# Altium PCB 400503.PcbDoc (part 2 of 3)
Units mm, origin at the board's own origin, x right, y up, seen from the top; angles counter-clockwise.
Board outline 200 x 200 mm, 4 copper layers (Top Layer, Mid-Layer 1, Mid-Layer 2, Bottom Layer), stack 1.58 mm thick; 173 components, 73 nets, 535 pads, 1026 vias.
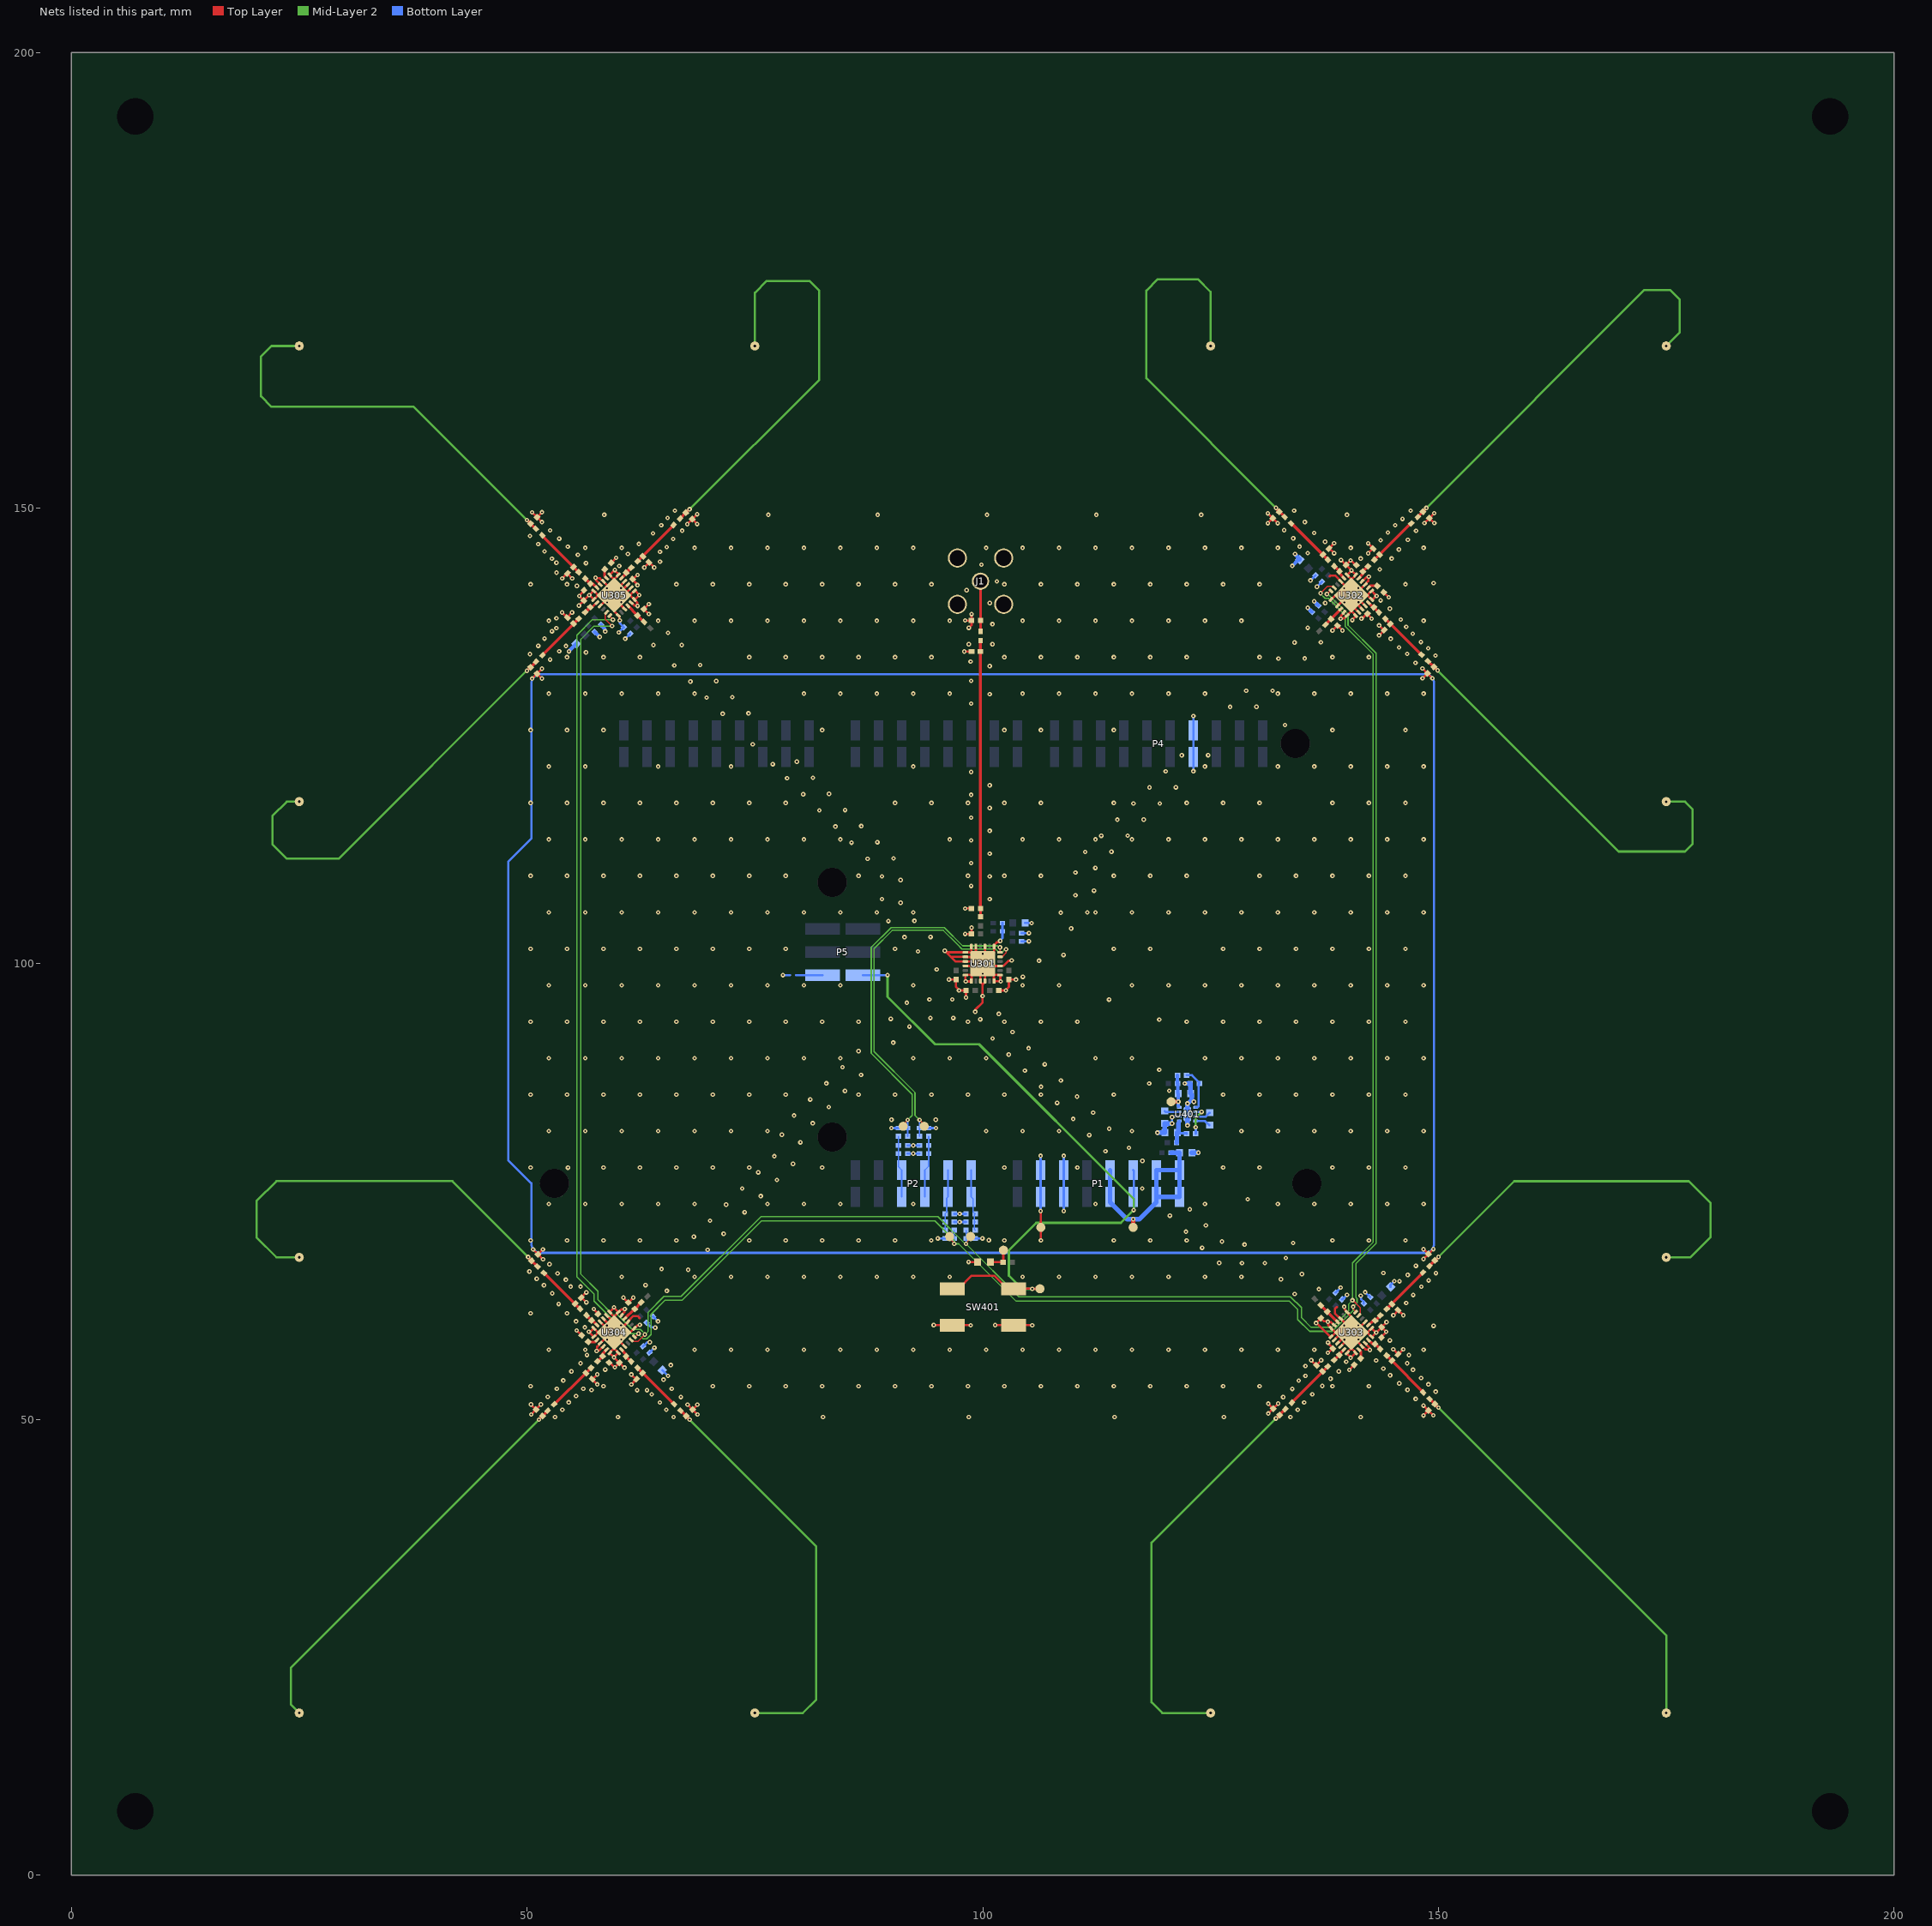
[diagram p4: the nets of this part, all layers, seen from the top]

## Via types
v1: diameter 0.5, hole 0.2, Top Layer to Bottom Layer, tented both sides, 989 vias
v2: diameter 0.5, hole 0.2, Top Layer to Bottom Layer, 25 vias
v3: diameter 0.6, hole 0.3, Top Layer to Bottom Layer, tented both sides, 12 vias

## Nets (pads, with @x,y where several pads share a name; then routed paths per layer and width w, separated by ;. In a path a pad name is that pad's centre, name@x,y a point inside that pad or via, vN(x,y) a via of type N, cw(c..) or ccw(c..) an arc to the next point about the centre after c; other vN are vias at no path point) (continued)
GND: C301.1 C302.1 C303.1 C304.1 C305.1 C306.1 C307.1 C308.1 C309.1 C310.1 C311.1 C312.1 C313.1 C314.1 C315.1 C316.1 C317.1 C318.1 C319.1 C320.1 C321.1 C322.1 C323.1 C324.1 C325.1 C326.1 C327.1 C328.1 C329.1 C401.1 C403.1 C404.1 C501.1 J1.2 J1.3 J1.4 J1.5 L305.1 L306.1 L307.1 L308.1 L309.1 L310.1 L311.1 L312.1 L313.1 L314.1 L315.1 L316.1 L501.1 LED401.1 P1.6 P1.7 P4.7 R302.1 R305.1 R308.1 R311.1 R314.1 R317.1 R320.1 R323.1 R326.1 R329.1 R332.1 R335.1 R337.2 R338.2 R339.2 R340.2 R341.1 R342.1 R343.1 R344.1 R345.1 R346.1 R347.1 R348.1 R404.1 R501.1 R502.1 R503.1 R504.1 R506.1 R507.1 SB501.2 SW401.2 TP502.1 U301.1 U301.2 U301.3 U301.4 U301.6 U301.7 U301.9 U301.10 U301.12 U301.13 U301.15 U301.19 U301.21 U301.23 U301.24 U301.25 U302.1 U302.2 U302.3 U302.4 U302.6 U302.7 U302.9 U302.10 U302.12 U302.13 U302.15 U302.19 U302.21 U302.23 U302.24 U302.25 U303.1 U303.2 U303.3 U303.4 U303.6 U303.7 U303.9 U303.10 U303.12 U303.13 U303.15 U303.19 U303.21 U303.23 U303.24 U303.25 U304.1 U304.2 U304.3 U304.4 U304.6 U304.7 U304.9 U304.10 U304.12 U304.13 U304.15 U304.19 U304.21 U304.23 U304.24 U304.25 U305.1 U305.2 U305.3 U305.4 U305.6 U305.7 U305.9 U305.10 U305.12 U305.13 U305.15 U305.19 U305.21 U305.23 U305.24 U305.25 U401.2 U401.9 V301.2 V302.2 V303.2 V304.2 V305.2 V306.2 V307.2 V308.2 V309.2 V310.2 V311.2 V312.2 V501.2 V502.2 V503.2 V504.2 V505.2 | length 667.2
  Top Layer w0.25: v1(50.43,51.656) 50.972,51.115 v1@51.513,51.656 ; v1(50.449,50.555) V308.2@50.99,51.097 ; v1@50.549,131.306 V310.2@51.09,131.847 ; v1@50.557,149.551 V311.2@51.097,149.01 ; v1@50.663,68.668 V309.2@51.204,68.127 ; v1(51.632,131.306) V310.2@51.09,131.847 ; v1@51.631,132.388 V310.2@51.09,131.847 ; v1@51.638,148.469 V311.2@51.097,149.01 ; v1(51.638,149.552) V311.2@51.097,149.01 ; v1@51.745,67.586 V309.2@51.204,68.127 ; v1(51.745,68.669) V309.2@51.204,68.127 ; v1@53.854,138.557 L314.1@54.395,138.016 ; v1(53.862,142.298) L315.1@54.403,142.84 ; L314.1@54.396,138.018 v1(54.937,138.559) ; L315.1@54.404,142.841 v1@54.945,142.299 ; v1@55.451,59.775 R339.2@55.992,59.234 ; v1(55.694,139.312) R329.1@56.234,139.855 ; L313.1@55.959,63.408 v1@56.5,63.949 ; L313.1@55.96,63.407 v1(56.502,62.866) ; R332.1@56.242,141.002 56.242,140.944 55.722,140.425 v1(55.722,140.367) R329.1@56.234,139.855 56.234,139.882 v1(56.822,140.47) v1@56.849,140.47 ; v1(56.776,59.627) 56.783,59.634 56.947,59.634 U304.6@57.319,60.006 57.354,60.006 U304.25@57.814,59.546 ; v1(56.776,59.627) U304.7@57.317,59.086 ; L312.1@57.16,54.403 v1@57.701,53.862 ; L312.1@57.16,54.404 v1@57.701,54.945 ; U304.7@57.319,59.086 57.354,59.086 U304.25@57.814,59.546 ; v1(57.329,62.122) 57.329,62.08 57.79,61.619 R326.1@57.79,61.576 R326.1@57.848,61.576 ; v1(57.522,142.366) v1@57.57,142.318 ; v1(57.634,57.522) v1@57.682,57.57 ; U304.4@58.026,60.713 U304.25@59.192,59.546 ; U305.15@58.026,139.287 U305.25@59.192,140.454 ; U305.10@58.026,141.621 58.026,141.656 57.57,142.112 v1@57.57,142.318 ; U304.10@58.379,58.026 58.344,58.026 57.888,57.57 v1@57.682,57.57 ; U304.3@58.379,61.066 U304.25@59.546,59.899 ; U304.2@58.733,61.42 U304.25@59.546,60.607 ; v2(58.766,60.317) 58.775,60.317 v2(59.546,59.546) ; v2(58.766,141.225) 58.775,141.225 v2(59.546,140.454) ; v2(58.775,58.766) 58.775,58.775 v2(59.546,59.546) ; v2(58.775,139.674) 58.775,139.683 v2(59.546,140.454) ; R323.1@58.998,56.242 59.056,56.242 59.575,55.722 v1(59.633,55.722) R320.1@60.145,56.234 60.118,56.234 v1(59.53,56.822) v1@59.53,56.849 ; U305.7@59.086,142.681 59.086,142.646 U305.25@59.546,142.186 ; U305.7@59.086,142.683 59.627,143.223 59.627,143.157 60.036,142.748 60.036,142.712 U305.6@60.006,142.681 60.006,142.646 U305.25@59.546,142.186 ; R340.2@59.234,144.007 v1@59.775,144.549 ; v1(59.53,62.322) v1@59.53,62.27 ; U304.24@60.006,61.773 60.006,61.809 59.546,62.27 v1@59.53,62.27 ; R320.1@60.145,56.234 v1(60.688,55.694) ; v1(60.17,137.678) 60.17,137.745 60.112,137.804 60.112,138.121 U305.19@60.006,138.227 60.006,138.262 59.546,138.722 U305.25@59.546,140.101 ; v2(60.317,60.326) 60.317,60.317 v2(59.546,59.546) ; v2(60.317,141.234) 60.317,141.225 v2(59.546,140.454) ; v2(60.326,58.775) 60.317,58.775 v2(59.546,59.546) ; v2(60.326,139.683) 60.317,139.683 v2(59.546,140.454) ; U304.23@60.359,61.42 60.359,61.455 60.682,61.778 v1@60.682,62.074 ; v1@60.575,63.371 R346.1@61.116,62.831 ; U304.15@60.713,58.026 U304.25@59.546,59.192 ; U305.4@60.713,141.974 U305.25@59.546,140.808 ; v1(60.73,62.122) v1@60.682,62.074 ; U305.21@60.746,138.934 U305.21@60.713,138.934 U305.25@59.546,140.101 ; U305.3@61.066,141.621 U305.25@59.899,140.454 ; R346.1@61.116,62.831 v1(61.657,63.373) ; U305.23@61.42,139.641 61.455,139.641 61.778,139.318 v1@62.074,139.318 ; U305.2@61.42,141.267 U305.25@60.607,140.454 ; v1(61.441,54.937) L311.1@61.982,54.396 ; v1@61.443,53.854 L311.1@61.984,54.395 ; v1(62.114,141.557) 62.114,141.614 61.576,142.152 R335.1@61.576,142.21 61.619,142.21 62.08,142.671 v1(62.122,142.671) ; v1(62.122,139.27) v1@62.074,139.318 ; 62.353,61.115 62.116,61.351 61.671,61.351 61.066,60.746 U304.21@61.066,60.713 U304.25@59.899,59.546 ; v1(62.37,60.378) 62.322,60.33 62.133,60.33 61.809,60.006 U304.19@61.773,60.006 61.738,60.006 61.278,59.546 U304.25@59.899,59.546 ; R348.1@62.824,138.931 v1(63.363,139.474) ; R348.1@62.824,138.931 v1(63.364,138.39) ; v1@62.866,143.499 L316.1@63.407,144.04 ; L316.1@63.408,144.041 v1@63.949,143.5 ; v1(67.586,148.254) V312.2@68.127,148.796 ; v1(67.611,51.631) V307.2@68.153,51.09 ; v1(68.669,148.255) V312.2@68.127,148.796 ; v1@68.668,149.337 V312.2@68.127,148.796 ; v1@68.694,50.549 V307.2@68.153,51.09 ; v1@68.694,51.631 V307.2@68.153,51.09 ; v1@94.626,60.349 SW401.2@96.649,60.349 v1@98.672,60.349 ; v1(95.835,101.44) v1@96.007,101.268 ; v1(96.298,98.279) 96.301,98.279 96.302,98.278 R347.1@97.07,98.278 97.07,97.475 97.398,97.147 v1(97.398,97.079) 97.401,97.079 97.402,97.078 R345.1@98.17,97.078 98.17,96.31 98.168,96.308 v1(98.168,96.306) ; v1(97.97,134.278) L501.1@98.795,134.278 ; v1(98.07,103.278) R507.1@98.77,103.278 v1(98.77,103.978) ; v1(98.07,106.078) R506.1@98.77,106.078 ; v1(98.07,137.678) V505.2@98.77,137.678 ; U301.4@98.1,99.768 U301.25@98.903,99.768 ; v1(98.441,67.286) LED401.1@99.453,67.286 ; v1(98.47,136.878) 98.77,137.178 V505.2@98.77,137.678 ; U301.24@98.75,101.918 98.758,101.91 U301.25@98.758,101.26 ; v1(98.77,138.378) V505.2@98.77,137.678 ; v2(98.903,100.011) 98.91,100.018 v2(100,100.018) ; v1(99.174,94.742) 99.174,94.941 99.986,95.753 v1(99.986,96.478) 99.986,97.732 ; U301.23@99.25,101.918 U301.25@99.25,100.768 ; v2(100.007,98.921) 100,98.928 v2(100,100.018) ; v2(100.007,101.103) 100,101.096 v2(100,100.018) ; U301.25@100.25,98.921 U301.10@100.25,98.118 100.25,97.968 100.014,97.732 99.986,97.732 ; U301.21@100.25,101.918 100.25,100.268 101.242,101.26 101.242,101.55 101.253,101.561 101.253,101.915 U301.19@101.25,101.918 101.25,102.068 101.543,102.36 101.732,102.36 101.892,102.519 v1(101.92,102.519) ; v2(101.097,100.024) 101.09,100.018 v2(100,100.018) ; v1@101.376,60.349 SW401.2@103.399,60.349 v1@105.422,60.349 ; R343.1@101.77,97.078 102.538,97.078 102.539,97.076 v1(102.542,97.076) 102.542,97.144 102.87,97.472 R341.1@102.87,98.278 103.638,98.278 103.639,98.276 v1(103.642,98.276) ; v1(101.97,98.078) v1@101.935,98.113 ; v1(103.17,100.378) 103.122,100.33 102.823,100.33 102.286,99.793 101.925,99.793 U301.15@101.9,99.768 100.25,99.768 U301.25@101.225,98.793 ; v1(106.35,72.878) 106.36,72.868 106.36,71.088 TP502.1@106.37,71.078 106.376,71.072 106.376,69.66 v1(106.382,69.655) ; v1(131.288,148.35) V301.2@131.829,148.892 ; v1@131.288,149.433 V301.2@131.829,148.892 ; v1(131.332,50.662) V306.2@131.873,51.204 ; v1(131.331,51.745) V306.2@131.873,51.204 ; v1(132.371,148.351) V301.2@131.829,148.892 ; v1@132.414,51.745 V306.2@131.873,51.204 ; v1@136.051,56.5 L310.1@136.592,55.959 ; L310.1@136.593,55.96 v1(137.134,56.502) ; v1(137.878,57.329) 137.92,57.329 138.381,57.79 R317.1@138.424,57.79 138.424,57.848 137.886,58.386 v1(137.886,58.443) ; L305.1@138.016,145.604 138.019,145.604 v1(138.559,145.063) ; L305.1@138.016,145.605 v1(138.557,146.147) ; 138.079,142.518 138.174,142.613 138.684,142.613 138.992,142.305 139.287,142.01 U302.15@139.287,141.974 U302.25@140.454,140.808 ; U302.19@138.227,139.994 138.262,139.994 138.722,140.454 U302.25@140.101,140.454 ; v1@138.382,136.582 138.922,137.123 v1(139.465,136.583) ; U303.2@138.58,58.733 U303.25@139.393,59.546 ; U303.23@138.58,60.359 138.545,60.359 138.222,60.682 v1@137.926,60.682 ; 138.885,62.353 138.649,62.116 138.649,61.671 139.254,61.066 U303.21@139.287,61.066 U303.25@140.454,59.899 ; U303.3@138.934,58.379 U303.25@140.1,59.546 ; U302.21@138.934,139.254 U302.21@138.934,139.287 U302.25@140.101,140.454 ; v1(139.27,137.878) v1@139.318,137.926 ; U303.4@139.287,58.026 U303.25@140.454,59.192 ; v1(139.312,144.306) R302.1@139.855,143.766 ; U302.23@139.641,138.58 139.641,138.545 139.318,138.222 v1@139.318,137.926 ; v1(139.67,62.378) 139.718,62.33 139.718,62.085 139.994,61.809 U303.19@139.994,61.773 139.994,61.738 140.454,61.278 U303.25@140.454,59.899 ; v2(139.674,60.317) 139.683,60.317 U303.25@140.454,59.546 ; v2(139.674,141.225) 139.683,141.225 v2(140.454,140.454) ; v2(139.683,58.765) 139.683,58.775 140.338,59.43 v2(140.57,59.43) ; v2(139.683,139.674) 139.683,139.683 v2(140.454,140.454) ; U302.24@139.994,138.227 U302.24@139.959,138.227 ; U303.25@140.216,59.43 U303.25@140.1,59.546 ; v1(140.225,55.45) R338.2@140.766,55.992 ; v1(140.559,137.72) 140.559,137.787 140.938,138.167 140.938,138.202 U302.1@140.914,138.227 140.914,138.262 U302.25@140.454,138.722 ; U303.7@140.914,57.317 v1(140.373,56.776) 140.373,56.843 139.964,57.252 139.964,57.288 U303.6@139.994,57.319 139.994,57.354 U303.25@140.454,57.814 ; U303.7@140.914,57.319 140.914,57.354 U303.25@140.454,57.814 ; R305.1@141.002,143.758 140.944,143.758 140.425,144.278 v1(140.367,144.278) R302.1@139.855,143.766 139.882,143.766 v1(140.47,143.178) v1@140.47,143.151 ; v2(141.225,60.326) 141.225,60.317 U303.25@140.57,59.662 ; v2(141.225,141.234) 141.225,141.225 v2(140.454,140.454) ; v2(141.234,58.775) 141.225,58.775 v2(140.57,59.43) ; v2(141.234,139.683) 141.225,139.683 v2(140.454,140.454) ; U302.2@141.267,138.58 U302.25@140.454,139.393 ; v1(141.557,137.886) 141.614,137.886 142.152,138.424 R308.1@142.21,138.424 142.21,138.381 142.671,137.92 v1(142.671,137.878) ; U302.3@141.621,138.934 U302.25@140.454,140.101 ; U302.10@141.621,141.974 141.656,141.974 142.112,142.43 v1@142.318,142.43 ; U303.10@141.974,58.379 141.974,58.344 142.43,57.888 v1@142.43,57.682 ; U303.15@141.974,60.713 U303.25@140.808,59.546 ; U302.4@141.974,139.287 U302.25@140.808,140.454 ; v1(142.298,146.138) 142.839,145.597 L306.1@142.841,145.597 ; v1(142.299,145.054) L306.1@142.841,145.596 ; v1(142.366,142.478) v1@142.318,142.43 ; v1(142.478,57.634) v1@142.43,57.682 ; U302.7@142.681,140.914 142.646,140.914 U302.25@142.186,140.454 ; U302.7@142.683,140.914 143.157,140.439 v1@143.157,140.373 ; v1(143.224,140.373) v1@143.157,140.373 ; v1(143.498,137.134) L307.1@144.04,136.593 ; v1@143.5,136.051 L307.1@144.041,136.592 ; R314.1@143.758,58.998 143.758,59.056 144.278,59.575 v1(144.278,59.633) R311.1@143.766,60.145 143.766,60.118 v1(143.178,59.53) v1@143.151,59.53 ; R311.1@143.766,60.146 v1(144.306,60.688) ; R337.2@144.008,140.766 v1@144.549,140.225 ; v1@145.055,57.701 L309.1@145.596,57.16 ; v1(145.063,61.441) L308.1@145.604,61.982 ; L309.1@145.597,57.16 v1@146.138,57.701 ; L308.1@145.605,61.984 v1@146.146,61.443 ; v1@148.255,131.332 V303.2@148.796,131.873 ; v1@148.255,132.414 V303.2@148.796,131.873 ; v1(148.362,50.448) V305.2@148.903,50.99 ; v1@148.362,51.531 V305.2@148.903,50.99 ; v1(148.369,67.611) V304.2@148.91,68.153 ; v1(148.368,68.694) V304.2@148.91,68.153 ; v1(148.469,148.361) V302.2@149.01,148.903 ; v1@149.337,131.332 V303.2@148.796,131.873 ; v1@149.443,50.449 V305.2@148.903,50.99 ; v1@149.451,68.694 V304.2@148.91,68.153 ; v1(149.552,148.362) V302.2@149.01,148.903 ; v1@149.551,149.443 V302.2@149.01,148.903 ; v1@56.849,140.47 56.849,140.454 57.308,139.994 U305.13@57.319,139.994 57.354,139.994 U305.25@57.814,140.454 ; v1@56.849,140.47 57.292,140.914 U305.12@57.319,140.914 57.354,140.914 U305.25@57.814,140.454 ; v1@57.57,142.318 58,142.318 58.344,141.974 U305.9@58.379,141.974 U305.25@59.546,140.808 ; v1@57.682,57.57 57.682,58 58.026,58.344 U304.9@58.026,58.379 U304.25@59.192,59.546 ; U304.25@57.814,59.546 U304.25@59.192,59.546 ; U305.25@57.814,140.454 U305.25@59.192,140.454 ; U304.25@59.192,59.546 v2(59.546,59.546) ; U305.25@59.192,140.454 v2(59.546,140.454) ; v1@59.53,56.849 59.546,56.849 60.006,57.308 U304.13@60.006,57.319 60.006,57.354 U304.25@59.546,57.814 ; v1@59.53,56.849 59.086,57.292 U304.12@59.086,57.319 59.086,57.354 U304.25@59.546,57.814 ; v1@59.53,62.27 59.078,61.817 59.078,61.782 U304.1@59.086,61.773 59.086,61.738 U304.25@59.546,61.278 ; U304.25@59.546,57.814 U304.25@59.546,59.192 ; U304.25@59.546,59.192 v2(59.546,59.546) ; v2(59.546,59.546) U304.25@59.546,59.899 ; v2(59.546,59.546) U304.25@59.899,59.546 ; U304.25@59.546,59.899 U304.25@59.546,60.607 ; U304.25@59.546,60.607 U304.25@59.546,61.278 ; U304.25@59.546,61.278 60.006,61.738 U304.24@60.006,61.773 60.041,61.773 60.342,62.074 v1@60.682,62.074 ; U305.25@59.546,140.101 v2(59.546,140.454) ; v2(59.546,140.454) U305.25@59.899,140.454 ; v2(59.546,140.454) U305.25@59.546,140.808 ; U305.25@59.546,140.808 U305.25@59.546,142.186 ; U305.25@59.899,140.454 U305.25@60.607,140.454 ; U305.25@60.607,140.454 U305.25@61.278,140.454 ; U305.25@61.278,140.454 61.738,139.994 U305.24@61.773,139.994 ; U305.25@61.278,140.454 61.738,140.914 U305.1@61.773,140.914 61.879,140.914 v1(62.322,140.47) 61.847,139.994 U305.24@61.773,139.994 ; U305.24@61.773,139.994 61.773,139.959 62.074,139.658 v1@62.074,139.318 ; v1@96.007,101.268 96.507,100.768 ; v1@96.007,101.268 U301.1@98.1,101.268 98.5,101.268 98.508,101.26 U301.25@98.758,101.26 ; 96.507,100.768 97.007,100.268 U301.3@98.1,100.268 99.75,100.268 U301.25@99.258,100.76 ; 96.507,100.768 U301.2@98.1,100.768 98.108,100.76 U301.25@99.258,100.76 ; U301.25@98.758,101.26 U301.25@99.25,100.768 ; U301.25@98.775,98.793 U301.25@99.75,99.768 ; U301.25@98.775,98.793 98.125,98.793 U301.6@98.1,98.768 98.096,98.763 98.096,98.022 v1(98.139,98.065) 98.725,98.065 98.75,98.09 U301.7@98.75,98.118 98.775,98.143 U301.25@98.775,98.793 ; U301.25@99.25,100.768 U301.25@99.258,100.76 ; U301.25@99.75,99.768 U301.9@99.75,98.118 99.75,97.968 99.986,97.732 ; U301.25@99.75,99.768 v2(100,100.018) ; U301.25@101.225,98.793 101.225,98.143 U301.12@101.25,98.118 101.27,98.098 101.92,98.098 v1@101.935,98.113 ; U301.25@101.225,98.793 101.875,98.793 U301.13@101.9,98.768 101.91,98.768 101.935,98.743 v1@101.935,98.113 ; v1@137.926,60.682 v1(137.878,60.73) 137.83,60.778 137.443,60.778 137.116,61.104 R344.1@137.116,61.124 v1(136.576,60.582) 136.642,60.583 138.165,59.06 138.201,59.06 U303.1@138.227,59.086 138.262,59.086 U303.25@138.722,59.546 ; v1@137.926,60.682 137.926,60.342 138.227,60.041 U303.24@138.227,60.006 138.262,60.006 U303.25@138.722,59.546 ; U303.25@138.722,59.546 U303.25@139.393,59.546 ; v1@139.318,137.926 139.658,137.926 U302.24@139.959,138.227 ; U303.25@139.393,59.546 U303.25@140.1,59.546 ; U302.24@139.959,138.227 U302.25@140.454,138.722 ; U303.25@140.1,59.546 U303.25@140.454,59.546 ; U302.25@140.101,140.454 v2(140.454,140.454) ; U303.25@140.454,57.814 U303.25@140.454,59.192 ; U303.25@140.454,59.192 U303.9@141.621,58.026 141.656,58.026 142,57.682 v1@142.43,57.682 ; U303.25@140.454,59.192 140.57,59.308 v2(140.57,59.43) ; U303.25@140.454,59.546 U303.25@140.57,59.546 ; U303.25@140.454,59.546 v2(140.57,59.43) ; U303.25@140.454,59.899 140.57,59.784 U303.25@140.57,59.662 ; U302.25@140.454,138.722 U302.25@140.454,139.393 ; U302.25@140.454,139.393 U302.25@140.454,140.101 ; U302.25@140.454,140.101 v2(140.454,140.454) ; v2(140.454,140.454) U302.25@140.808,140.454 ; v2(140.454,140.454) U302.25@140.454,140.808 ; U302.25@140.454,140.808 U302.25@140.454,142.186 ; U302.25@140.454,142.186 140.914,142.646 U302.12@140.914,142.681 140.914,142.708 v1@140.47,143.151 ; U302.25@140.454,142.186 139.994,142.646 U302.13@139.994,142.681 139.994,142.692 140.454,143.151 v1@140.47,143.151 ; v2(140.57,59.43) U303.25@140.57,59.546 ; v2(140.57,59.43) 140.692,59.43 U303.25@140.808,59.546 ; U303.25@140.57,59.546 U303.25@140.57,59.662 ; U303.25@140.57,59.546 U303.25@140.808,59.546 ; U303.25@140.808,59.546 U303.25@142.186,59.546 ; U302.25@140.808,140.454 U302.9@141.974,141.621 141.974,141.656 142.318,142 v1@142.318,142.43 ; U302.25@140.808,140.454 U302.25@142.186,140.454 ; U303.25@142.186,59.546 142.646,59.086 U303.12@142.681,59.086 142.708,59.086 v1@143.151,59.53 ; U303.25@142.186,59.546 142.646,60.006 U303.13@142.681,60.006 142.692,60.006 143.151,59.546 v1@143.151,59.53 ; U302.25@142.186,140.454 142.646,139.994 U302.6@142.681,139.994 142.712,139.964 142.748,139.964 v1@143.157,140.373
  Bottom Layer w0.25: v1(60.07,136.378) C325.1@60.616,136.924 60.616,136.931 60.189,137.359 60.189,137.659 v1(60.17,137.678) ; v1(60.77,135.678) C315.1@61.316,136.224 ; C322.1@62.724,58.031 63.17,58.478 v1(63.47,58.478) ; C323.1@63.124,60.624 63.622,60.126 64.022,60.126 v1(64.07,60.078) ; C311.1@63.424,57.331 v1(63.97,57.878) ; C312.1@63.824,61.31 63.837,61.31 v1(64.37,60.778) ; C310.1@64.847,55.4 v1(65.47,54.778) ; v1(78.068,98.762) SB501.2@78.85,98.762 ; v1(89.97,81.978) C326.1@90.77,81.978 ; V504.2@91.77,79.178 v1(92.37,79.178) V503.2@93.07,79.178 ; R504.1@91.77,80.078 v1(92.37,80.078) R503.1@93.07,80.078 ; C327.1@94.07,81.978 v1(94.87,81.978) ; v1(95.07,69.878) C328.1@95.87,69.878 ; R502.1@96.87,71.678 v1(97.47,71.678) R501.1@98.17,71.678 ; V502.2@96.87,72.578 v1(97.47,72.578) V501.2@98.17,72.578 ; C329.1@99.17,69.878 v1(99.97,69.878) ; v1(101.92,102.519) 101.92,102.587 102.17,102.837 C321.1@102.17,103.578 C303.1@102.17,104.478 ; C320.1@104.27,102.478 v1(105.07,102.478) ; C302.1@104.27,103.378 v1(105.07,103.378) ; C301.1@104.645,104.478 v1(105.37,104.478) ; v1(106.35,72.878) P1.7@106.35,74.44 P1.7@106.35,77.37 v1(106.35,78.932) ; v1(108.89,72.878) P1.6@108.89,77.37 v1(108.89,78.932) ; v1(120.77,82.478) v1(120.77,83.178) 120.838,83.178 120.918,83.258 U401.2@121.565,83.258 ; v1(123.114,121.138) v1(123.114,127.192) ; v1(135.97,142.078) C305.1@136.516,142.624 ; v1(136.67,141.378) C316.1@137.216,141.924 ; C309.1@138.724,63.931 v1(139.27,64.478) ; C319.1@139.431,63.184 139.476,63.184 v1(139.97,63.678) ; v1(141.47,63.578) 141.518,63.53 141.518,63.207 141.816,62.908 C318.1@141.816,62.731 ; v1(141.97,63.978) C308.1@142.516,63.431 ; C307.1@144.747,64.555 144.747,64.755 v1(145.17,65.178)
  Bottom Layer w0.254: 47.93,78.445 50.47,75.905 50.47,69.301 ccw(c51.473,69.288) 51.461,68.285 148.514,68.285 ccw(c148.514,69.301) 149.53,69.301 149.53,130.794 ccw(c148.527,130.782) 148.514,131.785 51.486,131.785 ccw(c51.486,130.769) 50.47,130.769 50.47,113.751 47.93,111.211 47.93,78.445
  Bottom Layer w0.4: v1@54.576,134.301 C313.1@55.393,135.118 ; C314.1@57.424,136.424 v1(57.97,135.878) ; C324.1@58.124,137.224 58.124,137.153 58.551,136.726 58.551,136.497 v1(58.57,136.478) ; v1(133.97,143.678) 134.647,144.355 C304.1@134.793,144.355 134.793,144.428 134.27,144.951 v1(134.27,144.978) ; v1(135.67,139.078) C306.1@136.116,138.631 ; v1(136.37,139.778) C317.1@136.816,139.331
  Bottom Layer w0.5: v1(119.17,81.478) C401.1@119.995,81.478 119.983,81.49 119.983,82.44 C403.1@120.02,82.478 ; C403.1@119.97,82.503 119.995,82.478 C403.1@120.02,82.478 ; v1(120.77,82.478) C403.1@120.02,82.478 ; v1(122.17,86.878) R404.1@122.77,86.878 122.793,86.855 122.793,85.8 C404.1@122.815,85.778 122.94,85.653 122.94,85.108 ; v1(122.47,82.278) 122.47,83.498 U401.9@122.46,83.508 122.47,83.518 v1(122.47,84.678) 122.51,84.678 122.94,85.108 ; C501.1@122.945,79.278 v1(123.67,79.278) ; v1(123.17,84.878) 122.94,85.108
  other v1: 53.07,50.278 59.97,50.278 66.073,50.27 82.47,50.278 98.47,50.278 114.47,50.278 126.47,50.278 133.771,50.262 141.47,50.278 149.444,50.449 68.695,50.549 65.273,51.07 134.571,51.062 53.87,51.078 148.361,51.531 68.694,51.632 51.513,51.657 132.414,51.746 54.57,51.878 64.573,51.87 135.271,51.862 147.51,52.258 132.971,52.462 52.27,52.478 66.873,52.47 55.37,52.578 63.673,52.77 136.171,52.762 149.71,53.058 57.066,53.225 62.079,53.217 63.163,53.218 146.61,53.258 53.27,53.378 56.17,53.378 65.873,53.37 133.971,53.362 50.382,53.655 58.382,53.655 70.382,53.655 74.382,53.655 78.382,53.655 82.382,53.655 86.382,53.655 90.382,53.655 94.382,53.655 98.382,53.655 102.382,53.655 106.382,53.655 110.382,53.655 114.382,53.655 118.382,53.655 122.382,53.655 126.382,53.655 130.382,53.655 138.382,53.655 142.382,53.655 137.27,53.678 57.702,53.862 61.443,53.853 148.91,53.858 145.71,53.958 134.671,54.262 53.97,54.278 64.97,54.378 138.17,54.478 148.11,54.558 135.416,54.78 144.71,54.858 57.701,54.946 54.87,55.278 139.07,55.278 147.21,55.458 58.57,55.478 143.97,55.578 135.413,55.864 65.77,55.978 55.87,56.178 146.57,56.178 139.888,56.341 143.17,56.478 136.05,56.5 56.57,57.078 146.775,57.066 52.382,57.655 56.382,57.655 68.382,57.655 72.382,57.655 76.382,57.655 80.382,57.655 84.382,57.655 88.382,57.655 92.382,57.655 96.382,57.655 100.382,57.655 104.382,57.655 108.382,57.655 112.382,57.655 116.382,57.655 120.382,57.655 124.382,57.655 128.382,57.655 132.382,57.655 136.382,57.655 148.382,57.655 145.054,57.701 146.138,57.702 144.67,58.678 55.45,59.775 56.341,60.112 149.47,60.278 94.62,60.355 98.679,60.343 101.37,60.355 105.429,60.343 55.37,60.778 146.147,61.443 50.382,61.655 54.382,61.655 53.47,62.678 146.47,62.778 60.574,63.371 147.235,63.667 134.226,63.764 52.754,63.837 56.5,63.95 65.339,64.116 136.892,64.299 148.135,64.567 54.78,64.584 55.864,64.587 51.854,64.737 62.998,64.746 145.735,65.167 148.935,65.267 54.254,65.337 132.718,65.39 51.054,65.437 60.382,65.655 68.382,65.655 72.382,65.655 76.382,65.655 80.382,65.655 84.382,65.655 88.382,65.655 92.382,65.655 96.382,65.655 104.382,65.655 108.382,65.655 112.382,65.655 116.382,65.655 120.382,65.655 124.382,65.655 128.382,65.655 146.635,65.867 135.025,65.962 53.354,66.037 143.97,66.078 149.735,66.067 50.254,66.237 67.672,66.426 64.766,66.513 147.535,66.867 52.454,67.037 128.45,67.16 130.95,67.158 125.95,67.187 51.746,67.586 133.258,67.73 69.815,68.613 50.662,68.668 149.451,68.695 124.072,68.836 128.732,69.196 134.07,69.378 126.255,69.532 50.382,69.655 54.382,69.655 58.382,69.655 62.382,69.655 66.382,69.655 74.382,69.655 78.382,69.655 82.382,69.655 86.382,69.655 90.382,69.655 94.347,69.655 102.382,69.655 114.382,69.655 118.382,69.655 122.382,69.655 138.382,69.655 142.382,69.655 146.382,69.655 100.67,69.678 68.302,70.049 71.566,70.381 122.304,70.604 124.487,71.3 70.069,71.817 120.536,72.372 73.877,72.745 122.72,73.068 71.837,73.584 52.382,73.655 56.382,73.655 60.382,73.655 64.382,73.655 68.382,73.655 76.382,73.655 80.382,73.655 84.382,73.655 92.382,73.655 112.382,73.655 124.382,73.655 132.382,73.655 136.382,73.655 140.382,73.655 144.382,73.655 148.382,73.655 129.07,74.178 75.645,74.513 73.605,75.352 117.498,75.338 77.412,76.28 75.373,77.12 50.382,77.655 54.491,77.64 58.382,77.655 62.382,77.655 66.382,77.655 70.382,77.655 74.382,77.655 82.382,77.655 102.382,77.655 110.382,77.655 126.382,77.655 130.382,77.655 138.382,77.655 142.382,77.655 146.382,77.655 79.18,78.048 117.528,78.378 77.141,78.888 113.465,79.443 116.038,79.824 79.988,80.414 111.697,81.211 77.952,81.252 52.382,81.655 56.382,81.655 60.382,81.655 64.382,81.655 68.382,81.655 72.382,81.655 76.382,81.655 100.382,81.655 104.382,81.655 108.382,81.655 116.382,81.655 128.382,81.655 132.382,81.655 136.382,81.655 140.382,81.655 144.382,81.655 148.382,81.655 113.881,81.906 81.345,82.513 89.995,82.903 94.845,82.903 109.93,82.978 79.306,83.354 112.113,83.674 83.113,84.281 108.162,84.746 81.074,85.121 110.345,85.442 50.382,85.655 54.382,85.655 58.382,85.655 62.382,85.655 66.382,85.655 70.382,85.655 74.382,85.655 78.382,85.655 86.382,85.655 90.382,85.655 94.382,85.655 98.382,85.655 102.382,85.655 106.382,85.655 114.382,85.655 126.382,85.655 130.382,85.655 134.382,85.655 138.382,85.655 142.382,85.655 146.382,85.655 84.881,86.049 120.47,86.078 106.394,86.514 118.27,86.878 82.842,86.889 108.577,87.21 86.649,87.817 104.626,88.282 119.37,88.378 84.61,88.657 106.81,88.978 52.382,89.655 56.382,89.655 60.382,89.655 64.382,89.655 68.382,89.655 72.382,89.655 76.382,89.655 80.382,89.655 84.382,89.655 92.382,89.655 96.382,89.655 100.382,89.655 112.382,89.655 116.382,89.655 124.382,89.655 128.382,89.655 132.382,89.655 136.382,89.655 140.382,89.655 144.382,89.655 148.382,89.655 102.859,90.05 86.378,90.425 105.042,90.745 90.184,91.352 101.091,91.817 103.274,92.513 91.952,93.12 50.382,93.655 54.382,93.655 58.382,93.655 62.382,93.655 66.382,93.655 70.382,93.655 74.382,93.655 78.382,93.655 82.382,93.655 86.382,93.655 98.382,93.655 102.382,93.655 106.382,93.655 110.382,93.655 122.382,93.655 126.382,93.655 130.382,93.655 134.382,93.655 138.382,93.655 142.382,93.655 146.382,93.655 119.37,93.878 99.732,93.916 89.913,93.96 94.269,94.06 96.769,94.06 101.768,94.508 91.681,95.728 113.87,96.078 94.154,96.096 96.654,96.096 52.382,97.655 56.382,97.655 60.382,97.655 64.382,97.655 68.382,97.655 72.382,97.655 76.382,97.655 80.382,97.655 84.382,97.655 92.382,97.655 104.382,97.655 108.382,97.655 116.382,97.655 120.382,97.655 124.382,97.655 128.382,97.655 132.382,97.655 136.382,97.655 140.382,97.655 144.382,97.655 148.382,97.655 104.405,98.573 94.952,99.392 106.173,100.341 108.87,100.978 92.899,101.369 50.382,101.655 54.382,101.655 58.382,101.655 62.382,101.655 66.382,101.655 70.382,101.655 74.382,101.655 78.382,101.655 90.382,101.655 114.382,101.655 118.382,101.655 126.382,101.655 130.382,101.655 134.382,101.655 138.382,101.655 142.382,101.655 146.382,101.655 91.416,102.928 94.274,102.949 109.708,103.876 89.648,104.696 92.506,104.717 108.563,105.61 52.382,105.655 56.382,105.655 60.382,105.655 64.382,105.655 68.382,105.655 72.382,105.655 76.382,105.655 80.382,105.655 84.382,105.655 88.382,105.655 92.382,105.655 111.476,105.644 112.382,105.655 116.382,105.655 120.382,105.655 124.382,105.655 128.382,105.655 132.382,105.655 136.382,105.655 140.382,105.655 144.382,105.655 148.382,105.655 90.988,106.702 88.952,107.097 100.768,107.099 110.173,107.523 112.209,108.034 98.732,108.55 90.988,109.202 88.952,109.597 100.768,109.599 50.382,109.655 54.382,109.655 58.382,109.655 62.382,109.655 66.382,109.655 70.382,109.655 74.382,109.655 78.382,109.655 86.382,109.655 98.382,109.655 102.382,109.655 106.382,109.655 114.382,109.655 118.382,109.655 122.382,109.655 130.382,109.655 134.382,109.655 138.382,109.655 142.382,109.655 146.382,109.655 110.173,110.023 112.362,110.53 98.732,111.05 87.373,111.535 90.209,111.578 100.768,112.099 111.237,112.285 114.129,112.297 85.605,113.303 88.441,113.346 98.732,113.55 52.382,113.655 56.382,113.655 60.382,113.655 64.382,113.655 68.382,113.655 72.382,113.655 76.382,113.655 80.382,113.655 84.382,113.655 96.382,113.655 104.382,113.655 108.382,113.655 112.382,113.655 116.382,113.655 120.382,113.655 124.382,113.655 128.382,113.655 132.382,113.655 136.382,113.655 140.382,113.655 144.382,113.655 148.382,113.655 113.005,114.052 115.897,114.065 100.768,114.599 83.838,115.07 86.674,115.114 114.773,115.82 117.665,115.833 98.732,116.05 82.07,116.838 84.906,116.881 100.768,117.099 116.541,117.588 119.433,117.601 50.382,117.655 54.382,117.655 58.382,117.655 62.382,117.655 66.382,117.655 70.382,117.655 74.382,117.655 78.382,117.655 90.382,117.655 94.382,117.655 98.382,117.655 102.382,117.655 106.382,117.655 114.382,117.655 122.382,117.655 126.382,117.655 130.382,117.655 138.382,117.655 142.382,117.655 146.382,117.655 98.732,118.55 80.302,118.606 83.138,118.649 118.309,119.356 121.2,119.369 100.768,119.599 78.534,120.374 81.37,120.417 98.732,121.05 120.076,121.124 52.382,121.655 56.382,121.655 64.382,121.655 72.382,121.655 92.382,121.655 124.382,121.655 132.382,121.655 136.382,121.655 140.382,121.655 144.382,121.655 148.382,121.655 76.959,121.913 79.603,122.185 121.844,122.891 124.736,122.904 74.756,124.088 50.382,125.655 54.382,125.655 58.382,125.655 82.382,125.655 102.382,125.655 106.382,125.655 114.382,125.655 138.382,125.655 146.382,125.655 133.166,126.206 71.463,127.445 74.299,127.488 127.147,128.195 130.039,128.207 98.732,128.55 69.695,129.213 72.531,129.256 100.768,129.599 52.382,129.655 56.382,129.655 60.382,129.655 64.382,129.655 68.382,129.655 80.382,129.655 84.382,129.655 88.382,129.655 92.382,129.655 96.382,129.655 104.382,129.655 108.382,129.655 112.382,129.655 116.382,129.655 120.382,129.655 124.382,129.655 132.382,129.655 136.382,129.655 140.382,129.655 144.382,129.655 148.382,129.655 128.915,129.962 131.807,129.975 67.928,130.98 70.764,131.024 98.732,131.05 50.549,131.305 148.255,131.331 149.338,131.332 51.631,132.389 148.254,132.414 100.77,132.678 66.16,132.748 68.996,132.791 147.486,133.023 98.67,133.178 52.525,133.394 132.451,133.498 135.343,133.511 54.382,133.655 58.382,133.655 62.382,133.655 74.382,133.655 78.382,133.655 82.382,133.655 86.382,133.655 90.382,133.655 94.382,133.655 102.382,133.655 106.382,133.655 110.382,133.655 114.382,133.655 118.382,133.655 122.382,133.655 130.382,133.655 138.382,133.655 142.382,133.655 149.686,133.823 50.325,133.994 146.586,134.023 56.47,134.178 53.525,134.294 54.594,134.283 148.886,134.623 145.686,134.723 54.27,134.878 51.225,134.894 63.87,134.978 66.97,134.978 98.47,135.078 101.07,135.078 134.218,135.266 137.11,135.278 148.086,135.323 144.77,135.678 51.925,135.694 143.5,136.05 147.186,136.223 65.46,136.327 52.725,136.494 138.382,136.581 53.218,136.837 135.67,136.878 146.47,136.978 101.07,137.278 52.382,137.654 64.382,137.654 68.382,137.654 72.382,137.654 76.382,137.654 80.382,137.654 84.382,137.654 88.382,137.654 92.382,137.654 96.382,137.654 104.382,137.654 108.382,137.654 112.382,137.654 116.382,137.654 120.382,137.654 124.382,137.654 128.382,137.654 148.382,137.654 145.87,137.778 53.217,137.921 53.853,138.557 144.67,138.978 100.778,139.597 137.579,139.596 143.659,139.888 144.55,140.225 98.24,140.999 55.47,141.478 50.382,141.654 54.382,141.654 66.382,141.654 70.382,141.654 74.382,141.654 78.382,141.654 82.382,141.654 86.382,141.654 90.382,141.654 94.382,141.654 102.382,141.654 106.382,141.654 110.382,141.654 114.382,141.654 118.382,141.654 122.382,141.654 126.382,141.654 130.382,141.654 146.382,141.654 149.47,141.778 101.558,141.972 54.946,142.299 53.225,142.934 59.627,143.224 143.57,143.278 62.866,143.498 63.95,143.5 60.112,143.659 99.862,143.808 56.47,143.978 53.224,144.018 64.587,144.136 52.725,144.462 141.47,144.478 144.87,144.478 59.775,144.55 55.57,144.878 61.07,144.978 135.67,145.078 64.584,145.22 51.925,145.262 145.67,145.478 56.382,145.654 60.382,145.654 68.382,145.654 72.382,145.654 76.382,145.654 80.382,145.654 84.382,145.654 88.382,145.654 92.382,145.654 100.382,145.654 104.382,145.654 108.382,145.654 112.382,145.654 116.382,145.654 120.382,145.654 124.382,145.654 128.382,145.654 132.382,145.654 140.382,145.654 148.382,145.654 65.325,145.734 54.47,145.778 134.774,145.794 51.225,146.062 62.27,146.078 137.574,146.323 143.67,146.478 146.654,146.523 66.025,146.634 53.525,146.662 134.074,146.694 50.325,146.962 63.825,147.234 136.371,147.289 144.454,147.323 67.025,147.534 147.554,147.523 52.525,147.562 133.074,147.594 145.254,148.123 64.725,148.134 51.639,148.469 135.347,148.48 146.054,148.823 65.425,148.934 58.47,149.278 76.47,149.278 88.47,149.278 100.47,149.278 112.47,149.278 123.97,149.278 139.97,149.278 68.668,149.338 131.287,149.433 149.551,149.445 50.555,149.551 146.954,149.723 66.225,149.734 134.17,149.726
NetANT_1_1: ANT_1.1 C330.2 V301.1 | length 45.2
  Top Layer w0.315: v1(132.174,150.033) 132.174,149.997 132.536,149.635 V301.1@132.536,149.599 132.575,149.599 C330.2@133.136,149.038
  Mid-Layer 2 w0.24: v3(125,167.8) 125,173.751 123.633,175.117 119.207,175.117 117.955,173.866 117.955,164.251 v1(132.174,150.033)
NetANT_2_1: ANT_2.1 C331.2 V302.1 | length 45.2
  Top Layer w0.315: C331.2@147.735,149.039 V302.1@148.303,149.609 ; V302.1@148.303,149.61 148.303,149.627 148.684,150.008 v1(148.684,150.025)
  Mid-Layer 2 w0.24: v1(148.684,150.025) 172.601,173.943 175.437,173.943 176.465,172.914 176.465,169.265 v3(175,167.8)
NetANT_3_1: ANT_3.1 C332.2 V303.1 | length 45.2
  Top Layer w0.315: C332.2@148.861,133.204 148.879,133.204 V303.1@149.503,132.58 149.521,132.58 149.901,132.2 v1(149.919,132.2)
  Mid-Layer 2 w0.24: v1(149.919,132.2) 149.919,132.192 169.782,112.328 177.049,112.328 177.902,113.182 177.902,116.958 177.07,117.791 v3@174.851,117.791
  other v3: 175,117.791
NetANT_4_1: ANT_4.1 C333.2 V304.1 | length 45.2
  Top Layer w0.315: C333.2@149.014,66.847 149.018,66.847 V304.1@149.617,67.446 v1(150.015,67.844)
  Mid-Layer 2 w0.24: v1(150.015,67.844) 158.315,76.144 177.489,76.144 179.852,73.781 179.852,70 177.643,67.79 v3@175,67.79
  other v3: 175,67.799
NetANT_5_1: ANT_5.1 C334.2 V305.1 | length 45.2
  Top Layer w0.315: C334.2@149.039,52.265 149.041,52.265 V305.1@149.61,51.697 v1(150.008,51.299)
  Mid-Layer 2 w0.24: v1(150.008,51.299) 175,26.307 v3(175,17.8)
NetANT_6_1: ANT_6.1 C335.2 V306.1 | length 45.2
  Top Layer w0.315: v1(132.164,50.116) 132.182,50.116 132.562,50.497 V306.1@132.58,50.497 132.58,50.506 133.204,51.13 C335.2@133.204,51.139
  Mid-Layer 2 w0.24: v3(125,17.799) 119.712,17.799 118.53,18.981 118.53,36.482 v1(132.164,50.116)
NetANT_7_1: ANT_7.1 C336.2 V307.1 | length 45.2
  Top Layer w0.315: C336.2@66.847,50.986 66.847,50.982 V307.1@67.446,50.383 v1(67.844,49.985)
  Mid-Layer 2 w0.24: v1@67.832,49.973 81.73,36.075 81.73,19.266 80.264,17.8 v3(75,17.8)
NetANT_8_1: ANT_8.1 C337.2 V308.1 | length 45.2
  Top Layer w0.315: v1(51.299,49.992) V308.1@51.697,50.39 51.697,50.393 C337.2@52.265,50.961
  Mid-Layer 2 w0.24: v3(25,17.8) 24.072,18.728 24.072,22.741 v1@51.311,49.98
NetANT_9_1: ANT_9.1 C338.2 V309.1 | length 45.2
  Top Layer w0.315: v1(50.116,67.836) 50.116,67.818 50.497,67.438 V309.1@50.497,67.42 51.121,66.796 C338.2@51.139,66.796
  Mid-Layer 2 w0.24: v3(25,67.8) 22.488,67.8 20.305,69.983 20.305,73.961 22.497,76.154 41.798,76.154 v1(50.116,67.836)
NetANT_10_1: ANT_10.1 C339.2 V310.1 | length 45.2
  Top Layer w0.315: v1(49.985,132.156) V310.1@50.383,132.554 50.387,132.554 C339.2@50.986,133.153
  Mid-Layer 2 w0.24: v3(25,117.8) 23.626,117.8 22.059,116.233 22.059,113.115 23.606,111.569 29.363,111.569 49.95,132.156 v1(49.985,132.156)
NetANT_11_1: ANT_11.1 C340.2 V311.1 | length 45.2
  Top Layer w0.315: v1(49.992,148.701) V311.1@50.39,148.303 50.393,148.303 C340.2@50.961,147.735
  Mid-Layer 2 w0.24: v3(25,167.8) 21.952,167.8 20.812,166.659 20.812,162.278 21.952,161.137 37.557,161.137 v1(49.992,148.701)
NetANT_12_1: ANT_12.1 C341.2 V312.1 | length 45.2
  Top Layer w0.315: C341.2@66.796,148.861 66.796,148.879 V312.1@67.42,149.503 67.438,149.503 67.818,149.884 v1(67.836,149.884)
  Mid-Layer 2 w0.24: v1(67.836,149.884) 82.054,164.102 82.054,173.854 80.974,174.934 76.286,174.934 75,173.648 v3(75,167.8)
NetC326_2: C326.2 R352.2 TP304.1 U301.18 | length 40.2
  Top Layer w0.15: TP304.1@91.27,82.178 91.27,82.378 v1(91.77,82.878) ; v1(101.899,101.809) 101.9,101.808 U301.18@101.9,101.268
  Mid-Layer 2 w0.15: v1(91.77,82.878) 92.27,83.378 92.27,85.678 87.77,90.178 87.77,101.802 89.946,103.978 95.794,103.978 97.794,101.978 101.636,101.978 101.804,101.809 v1(101.899,101.809)
  Bottom Layer w0.15: R352.2@91.77,81.078 C326.2@91.77,81.978 v1(91.77,82.878)
NetC327_2: C327.2 R351.2 TP303.1 U301.17 | length 41.2
  Top Layer w0.15: v1(93.07,82.878) 93.57,82.378 TP303.1@93.57,82.178 ; U301.17@101.9,100.768 102.128,100.768 102.549,101.188 102.549,101.581 v1(102.56,101.592)
  Mid-Layer 2 w0.15: v1(93.07,82.878) 92.57,83.378 92.57,85.878 88.07,90.378 88.07,101.678 90.07,103.678 95.67,103.678 97.17,102.178 97.724,101.624 101.412,101.624 101.702,101.334 102.207,101.334 102.465,101.592 v1(102.56,101.592)
  Bottom Layer w0.15: R351.2@93.07,81.078 C327.2@93.07,81.978 v1(93.07,82.878)
NetC328_2: C328.2 R350.2 TP302.1 U302.18 U303.18 U304.18 U305.18 | length 264.4
  Top Layer w0.15: U305.18@59.086,138.227 59.079,138.219 59.079,138.113 v1(59.422,137.77) ; U304.18@61.773,59.086 61.781,59.079 61.887,59.079 v1(62.23,59.422) ; TP302.1@96.37,70.078 96.37,69.872 96.87,69.372 v1(96.87,69.278) ; v1(137.77,140.578) 138.113,140.921 138.219,140.921 U302.18@138.227,140.914 ; v1(140.649,62.374) 140.649,62.158 140.921,61.887 140.921,61.781 U303.18@140.914,61.773
  Mid-Layer 2 w0.15: v1(59.422,137.77) 57.168,137.77 55.47,136.072 55.47,65.652 57.347,63.775 57.347,63.001 59.27,61.078 59.27,60.701 60.549,59.422 v1(62.23,59.422) 62.23,59.351 62.733,58.847 63.127,58.847 63.595,59.316 63.595,61.54 65.145,63.089 67.02,63.089 75.731,71.8 94.748,71.8 96.87,69.678 v1(96.87,69.278) 97.37,69.278 103.67,62.978 133.67,62.978 134.57,62.078 134.57,60.978 135.87,59.678 138.37,59.678 139.199,60.506 139.199,60.513 140.649,61.964 v1(140.649,62.374) 141.07,62.795 141.07,63.278 140.97,63.378 140.97,67.147 143.157,69.333 143.157,134.09 140.084,137.163 140.084,138.383 138.064,140.403 138.04,140.403 137.865,140.578 v1(137.77,140.578)
  Bottom Layer w0.15: v1(96.87,69.278) C328.2@96.87,69.878 R350.2@96.87,70.778
NetC329_2: C329.2 R349.2 TP301.1 U302.17 U303.17 U304.17 U305.17 | length 267
  Top Layer w0.15: U305.17@58.733,138.58 58.733,138.474 58.574,138.316 58.574,137.818 v1(59.322,137.07) ; U304.17@61.42,58.733 61.526,58.733 61.684,58.574 62.182,58.574 v1(62.93,59.322) ; v1(98.17,69.278) 98.17,69.372 98.67,69.872 TP301.1@98.67,70.078 ; v1(137.07,140.678) 137.818,141.426 138.316,141.426 138.474,141.267 U302.17@138.58,141.267 ; v1(140.57,63.078) 140.618,63.078 141.426,62.27 141.426,62.182 141.426,61.684 141.267,61.526 U303.17@141.267,61.42
  Mid-Layer 2 w0.15: v1(59.322,137.07) 57.362,137.07 55.907,135.614 55.907,65.941 57.77,64.078 57.77,63.157 59.424,61.503 59.945,61.503 61.545,59.903 62.421,59.903 v1@62.93,59.394 ; v1(62.93,59.322) v1@62.93,59.394 ; v1(137.07,140.678) 137.07,140.606 137.573,140.103 137.94,140.103 139.762,138.281 139.762,137.06 142.857,133.965 142.857,69.458 140.57,67.171 v1(140.57,63.078) 140.174,62.682 140.174,61.953 138.328,60.107 136.04,60.107 134.97,61.178 134.97,62.278 133.77,63.478 103.97,63.478 v1(98.17,69.278) 98.07,69.278 95.078,72.27 75.669,72.27 66.91,63.511 65.021,63.511 63.295,61.785 63.295,59.687 63.002,59.394 v1@62.93,59.394
  Bottom Layer w0.15: v1(98.17,69.278) C329.2@98.17,69.878 R349.2@98.17,70.778
NetC330_1: C330.1 L305.2 R301.2 | length 5.7
  Top Layer w0.315: C330.1@133.843,148.331 133.875,148.331 137.309,144.897 R301.2@137.875,144.331
NetC331_1: C331.1 L306.2 R304.2 | length 5.7
  Top Layer w0.315: R304.2@142.982,144.324 143.548,144.89 146.99,148.332 C331.1@147.028,148.332
NetC332_1: C332.1 L307.2 R307.2 | length 5.6
  Top Layer w0.315: R307.2@144.182,137.866 144.748,137.3 144.757,137.3 148.145,133.911 C332.1@148.154,133.911
NetC333_1: C333.1 L308.2 R310.2 | length 5.7
  Top Layer w0.315: R310.2@144.331,62.125 144.897,62.691 144.897,62.71 148.307,66.12 C333.1@148.307,66.14
NetC334_1: C334.1 L309.2 R313.2 | length 5.7
  Top Layer w0.315: R313.2@144.324,57.018 144.89,56.452 144.89,56.433 148.332,52.991 C334.1@148.332,52.972
NetC335_1: C335.1 L310.2 R316.2 | length 5.6
  Top Layer w0.315: C335.1@133.911,51.846 133.911,51.855 137.3,55.243 137.3,55.252 R316.2@137.866,55.818
NetC336_1: C336.1 L311.2 R319.2 | length 5.7
  Top Layer w0.315: R319.2@62.125,55.669 62.691,55.103 62.71,55.103 66.12,51.693 C336.1@66.14,51.693
NetC337_1: C337.1 L312.2 R322.2 | length 5.7
  Top Layer w0.315: C337.1@52.972,51.668 52.991,51.668 56.433,55.11 56.452,55.11 R322.2@57.018,55.676
NetC338_1: C338.1 L313.2 R325.2 | length 5.6
  Top Layer w0.315: C338.1@51.846,66.089 51.855,66.089 55.243,62.7 55.252,62.7 R325.2@55.818,62.134
NetC339_1: C339.1 L314.2 R328.2 | length 5.7
  Top Layer w0.315: C339.1@51.693,133.86 51.693,133.88 55.103,137.29 55.103,137.309 R328.2@55.669,137.875
NetC340_1: C340.1 L315.2 R331.2 | length 5.7
  Top Layer w0.315: C340.1@51.668,147.028 51.668,146.99 55.11,143.548 R331.2@55.676,142.982
NetC341_1: C341.1 L316.2 R334.2 | length 5.6
  Top Layer w0.315: R334.2@62.134,144.182 62.7,144.748 62.7,144.757 66.089,148.145 C341.1@66.089,148.154
NetC401_2: C401.2 R401.2 R406.1 U401.1 | length 3.4
  Bottom Layer w0.3: C401.2@121.345,81.478 121.395,81.428 122.32,81.428 R406.1@122.37,81.378 ; 121.565,82.558 U401.1@121.565,82.758
  Bottom Layer w0.5: R401.2@121.27,80.378 121.282,80.378 121.307,80.403 121.307,81.44 C401.2@121.345,81.478 121.47,81.603 121.47,82.463
NetC402_1: C402.1 U401.7 | length 1.7
  Bottom Layer w0.25: U401.7@123.355,83.258 123.38,83.233 124.475,83.233 124.895,83.653 C402.1@124.92,83.653
NetC402_2: C402.2 U401.8 | length 1.7
  Bottom Layer w0.25: U401.8@123.355,82.758 124.39,82.758 124.845,82.303 C402.2@124.87,82.303
NetC403_2: C403.2 U401.3 | length 1.6
  Bottom Layer w0.25: C403.2@119.97,83.853 120.065,83.758 U401.3@121.565,83.758
NetC404_2: C404.2 R403.2 R405.1 TP402.1 U401.4 | length 4.4
  Top Layer w0.4: TP402.1@120.67,84.878 v1(121.465,84.878)
  Bottom Layer w0.15: U401.4@121.465,84.378 121.465,84.333 121.54,84.258 U401.4@121.565,84.258
  Bottom Layer w0.4: R403.2@121.37,87.778 R405.1@121.37,86.878 121.417,86.83 121.417,85.825 C404.2@121.465,85.778 v1(121.465,84.878) U401.4@121.465,84.378
NetC501_2: C501.2 P1.1 P1.2 P1.4 R508.1 TP501.1 | length 25.4
  Top Layer w0.5: TP501.1@116.51,71.078 v1(116.51,71.978)
  Bottom Layer w0.5: P1.4@113.97,77.37 P1.4@113.97,74.44 113.97,73.855 115.847,71.978 v1(116.51,71.978) 117.173,71.978 119.05,73.855 P1.2@119.05,74.44 ; R508.1@120.67,79.278 C501.2@121.595,79.278 121.592,79.275 121.592,77.373 P1.1@121.59,77.37 ; P1.2@119.05,74.44 P1.1@121.59,74.44 P1.1@121.59,77.37 ; P1.2@119.05,74.44 P1.2@119.05,77.37 P1.1@121.59,77.37
NetC502_1: C502.1 L501.2 R505.1 R506.2 | length 30.1
  Top Layer w0.315: R505.1@99.77,105.178 R506.2@99.77,106.078 99.745,106.103 L501.2@99.745,134.278 99.758,134.29 99.758,135.29 C502.1@99.77,135.303
NetC502_2: C502.2 J1.1 V505.1 | length 5.5
  Top Layer w0.315: J1.1@99.75,142 J1.1@99.76,141.99 99.76,137.688 V505.1@99.77,137.678 C502.2@99.77,136.478
NetL301_2: L301.2 R342.2 U302.22 | length 2.4
  Top Layer w0.315: L301.2@137.606,137.214 137.606,137.221 R342.2@138.216,137.831 138.216,137.863 138.87,138.516 U302.22@139.287,138.934
NetL302_2: L302.2 R344.2 U303.22 | length 2.6
  Top Layer w0.315: L302.2@137.106,62.542 137.113,62.542 R344.2@137.824,61.831 137.824,61.823 U303.22@138.934,60.713
NetL303_2: L303.2 R346.2 U304.22 | length 2.6
  Top Layer w0.315: U304.22@60.713,61.066 61.771,62.124 R346.2@61.824,62.124 62.534,62.835 L303.2@62.534,62.842
NetL304_2: L304.2 R348.2 U305.22 | length 2.5
  Top Layer w0.315: U305.22@61.066,139.287 62.116,138.237 R348.2@62.116,138.224 62.12,138.224 62.831,137.514 L304.2@62.834,137.514
NetLED401_2: LED401.2 R402.1 TP401.1 | length 2.7
  Top Layer w0.25: LED401.2@100.85,67.286 100.873,67.263 R402.1@102.251,67.263 102.26,67.272 102.26,68.568 TP401.1@102.27,68.578
NetP1_3: P1.3 P5.5 SW401.1 TP503.1 | length 79.2
  Top Layer w0.25: SW401.1@96.649,64.349 97.367,64.349 98.796,65.778 101.291,65.778 102.72,64.349 SW401.1@103.399,64.349 105.422,64.349 v1(105.429,64.343) TP503.1@106.27,64.343
  Mid-Layer 2 w0.25: v1(89.562,98.764) 89.562,96.385 94.77,91.178 99.601,91.178 116.57,74.209 v1(116.57,72.978) 115.17,71.578 105.87,71.578 102.87,68.578 102.87,65.778 104.305,64.343 v1(105.429,64.343)
  Bottom Layer w0.25: P5.5@86.856,98.765 89.54,98.765 89.542,98.764 v1(89.562,98.764) ; P1.3@116.51,77.37 116.57,77.31 v1(116.57,72.978)
NetP2_1: P2.1 R349.1 R501.2 V501.1 | length 6.9
  Bottom Layer w0.15: P2.1@98.73,77.37 P2.1@98.73,74.44 98.945,74.225 98.945,72.753 99.12,72.578 V501.1@99.17,72.578 99.07,72.478 99.07,71.778 R501.2@99.17,71.678 ; R501.2@99.07,71.678 99.07,70.878 R349.1@99.17,70.778
NetP2_2: P2.2 R350.1 R502.2 V502.1 | length 6.7
  Bottom Layer w0.15: R350.1@95.87,70.778 V502.1@95.87,72.578 96.045,72.753 96.045,74.295 P2.2@96.19,74.44 P2.2@96.19,77.37
NetP2_3: P2.3 R351.1 R503.2 V503.1 | length 6.8
  Bottom Layer w0.15: P2.3@93.65,74.44 P2.3@93.65,77.37 94.07,77.79 V503.1@94.07,79.178 R503.2@94.07,80.078 R351.1@94.07,81.078
NetP2_4: P2.4 R352.1 R504.2 V504.1 | length 6.8
  Bottom Layer w0.15: R352.1@90.77,81.078 R504.2@90.77,80.078 V504.1@90.77,79.178 90.77,77.71 P2.4@91.11,77.37 P2.4@91.11,74.44
NetP5_6: P5.6 SB501.1 | length 2.9
  Bottom Layer w0.152: P5.6@82.407,98.761 P5.6@82.411,98.765
  Bottom Layer w0.25: SB501.1@79.526,98.762 P5.6@82.407,98.761
NetR301_1: R301.1 R302.2 U302.14 | length 1.7
  Top Layer w0.315: R301.1@138.582,143.624 R302.2@139.148,143.058 139.148,142.821 U302.14@139.641,142.328
NetR304_1: R304.1 R305.2 U302.11 | length 1.7
  Top Layer w0.315: U302.11@141.267,142.328 141.727,142.788 141.727,143.034 R305.2@141.709,143.051 R304.1@142.275,143.617
NetR307_1: R307.1 R308.2 U302.5 | length 1.6
  Top Layer w0.315: U302.5@142.328,139.641 142.838,139.131 R308.2@142.917,139.131 142.917,139.12 143.464,138.573 R307.1@143.475,138.573
NetR310_1: R310.1 R311.2 U303.14 | length 1.7
  Top Layer w0.315: U303.14@142.328,60.359 142.821,60.852 R311.2@143.058,60.852 R310.1@143.624,61.418
NetR313_1: R313.1 R314.2 U303.11 | length 1.7
  Top Layer w0.315: U303.11@142.328,58.733 142.788,58.273 143.034,58.273 R314.2@143.051,58.291 R313.1@143.617,57.725
NetR316_1: R316.1 R317.2 U303.5 | length 1.6
  Top Layer w0.315: R316.1@138.573,56.525 R317.2@139.131,57.083 139.131,57.162 U303.5@139.641,57.672
NetR319_1: R319.1 R320.2 U304.14 | length 1.7
  Top Layer w0.315: U304.14@60.359,57.672 60.852,57.179 R320.2@60.852,56.942 R319.1@61.418,56.376
NetR322_1: R322.1 R323.2 U304.11 | length 1.7
  Top Layer w0.315: R322.1@57.725,56.383 R323.2@58.291,56.949 58.273,56.966 58.273,57.212 U304.11@58.733,57.672
NetR325_1: R325.1 R326.2 U304.5 | length 1.6
  Top Layer w0.315: R325.1@56.525,61.427 R326.2@57.083,60.869 57.162,60.869 U304.5@57.672,60.359
NetR328_1: R328.1 R329.2 U305.14 | length 1.7
  Top Layer w0.25: R329.2@56.942,139.148 57.144,139.148 57.637,139.641 U305.14@57.672,139.641
  Top Layer w0.355: R328.1@56.376,138.582 R329.2@56.942,139.148
NetR331_1: R331.1 R332.2 U305.11 | length 1.7
  Top Layer w0.3: R332.2@56.949,141.709 56.966,141.727 57.212,141.727 U305.11@57.672,141.267
  Top Layer w0.355: R331.1@56.383,142.275 R332.2@56.949,141.709
NetR334_1: R334.1 R335.2 U305.5 | length 1.6
  Top Layer w0.3: U305.5@60.359,142.328 60.869,142.838 R335.2@60.869,142.917
  Top Layer w0.355: R335.2@60.869,142.917 R334.1@61.427,143.475
NetR337_1: R337.1 U302.8 | length 1.1
  Top Layer w0.3: U302.8@142.328,141.267 142.561,141.501 143.096,141.501 143.123,141.473 R337.1@143.3,141.473
NetR338_1: R338.1 U303.8 | length 1.1
  Top Layer w0.3: U303.8@141.267,57.672 141.501,57.438 141.501,56.904 141.473,56.877 R338.1@141.473,56.7
NetR339_1: R339.1 U304.8 | length 1.1
  Top Layer w0.3: R339.1@56.7,58.527 56.877,58.527 56.904,58.499 57.439,58.499 U304.8@57.672,58.733
NetR340_1: R340.1 U305.8 | length 1.1
  Top Layer w0.3: R340.1@58.527,143.3 58.527,143.123 58.499,143.096 58.499,142.561 U305.8@58.733,142.328
NetR403_1: R403.1 R404.2 U401.5 | length 4.7
  Bottom Layer w0.25: R403.1@122.37,87.778 122.97,87.778 123.77,86.978 R404.2@123.77,86.878 123.695,86.803 123.695,84.398 123.555,84.258 U401.5@123.355,84.258
NetR406_2: R406.2 U401.6 | length 3.3
  Mid-Layer 2 w0.25: v1(123.37,82.078) 123.37,83.108 v1(124.02,83.758)
  Bottom Layer w0.25: U401.6@123.355,83.758 v1@123.97,83.758
  Bottom Layer w0.3: R406.2@123.37,81.378 v1(123.37,82.078)
pads on no net: P1.5 P1.8 P2.5 P2.6 P3.1 P3.2 P3.3 P3.4 P3.5 P3.6 P3.7 P3.8 P4.1 P4.2 P4.3 P4.4 P4.5 P4.6 P4.8 P4.9 P4.10 P5.1 P5.2 P5.3 P5.4 P6.1 P6.2 P6.3 P6.4 P6.5 P6.6 P6.7 P6.8 P6.9

## Polygon pours and split planes (outlines as drawn)
GND on Top Layer "L1_GND" (solid, pour order 18): 50,150 150,150 150,50 50,50
GND on Mid-Layer 1 "L2_GND" (solid, pour order 20): 50,150 150,150 150,50 50,50
GND on Mid-Layer 2 "L3_GND" (solid, remove dead copper, pour order 22): 50,150 150,150 150,50 50,50
GND on Bottom Layer "L4_GND" (solid, pour order 24): 0,200 200,200 200,0 0,0